# Altium PCB PCB1.PcbDoc
Units mil, origin at the board's own origin, x right, y up, seen from the top; angles counter-clockwise.
Board outline 1968.5 x 1975 mil, 2 copper layers (Top Layer, Bottom Layer); 15 components, 16 nets, 48 pads, 1 vias.
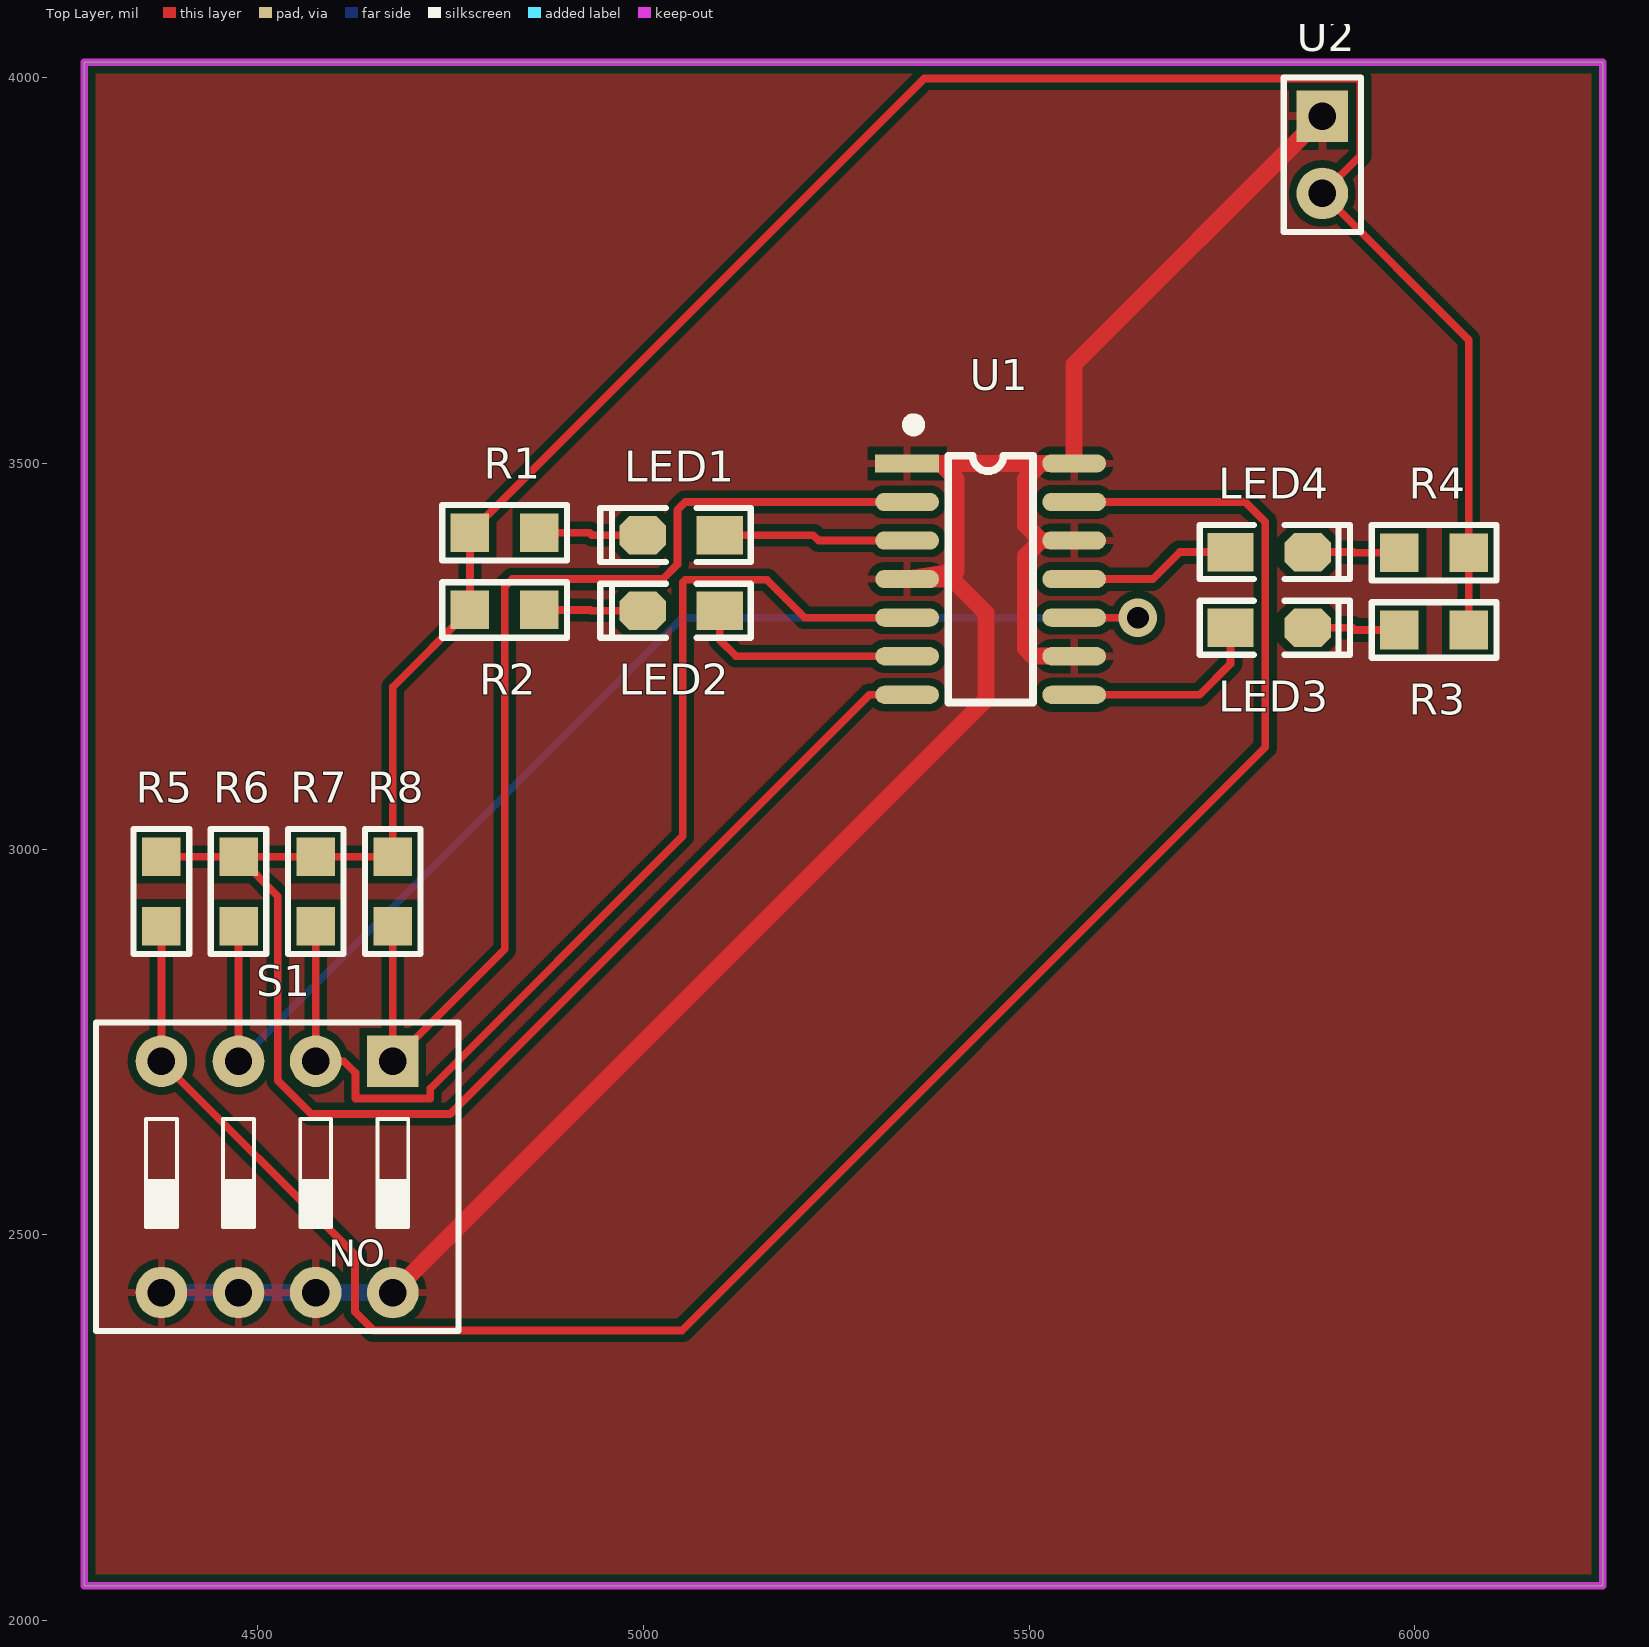
[diagram p0: Top Layer view]
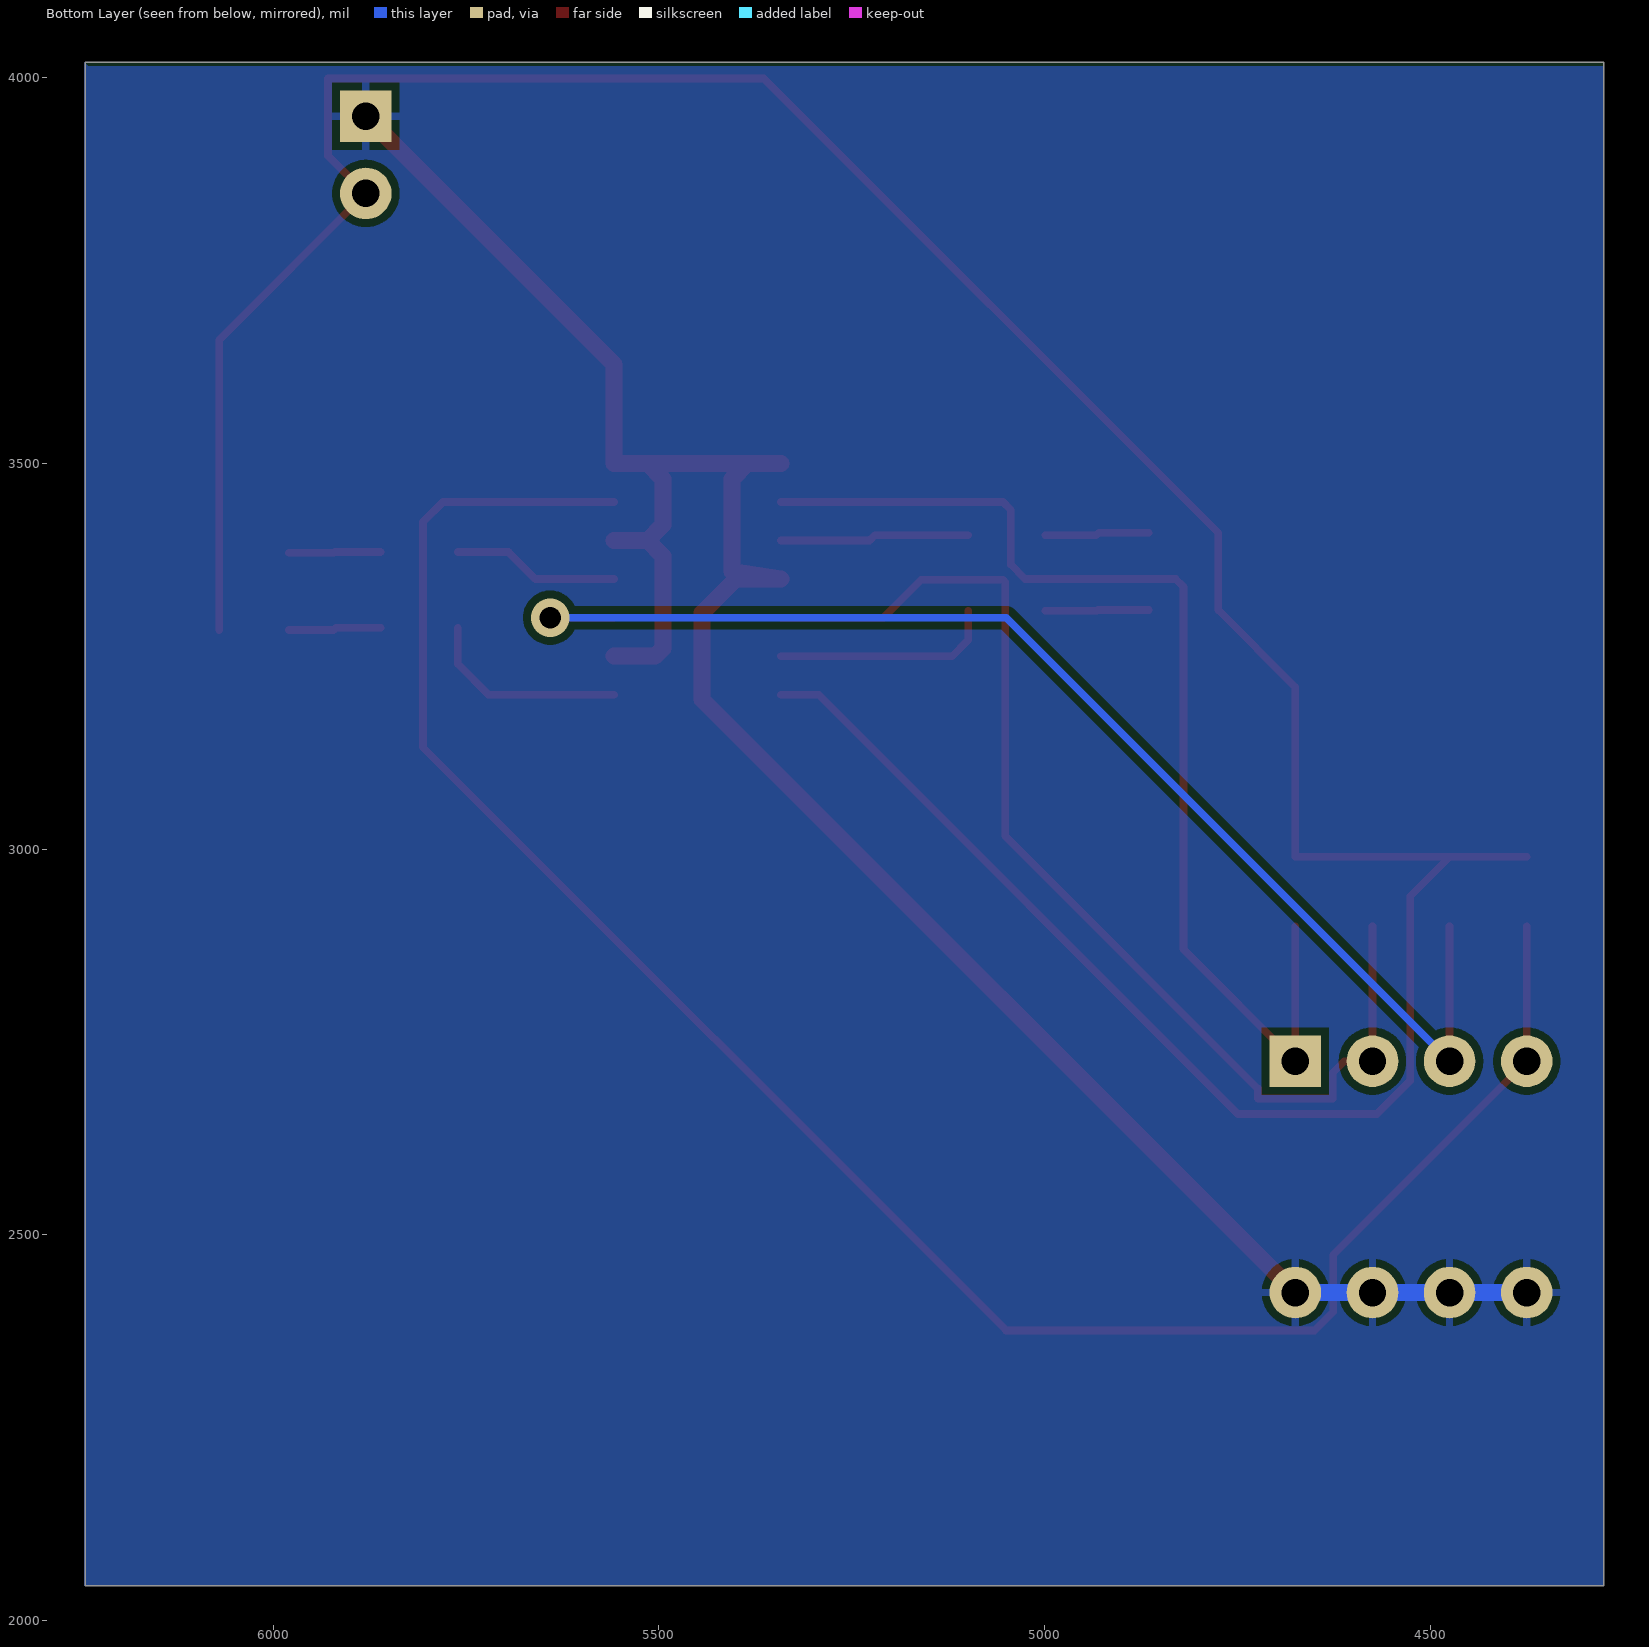
[diagram p1: Bottom Layer view, seen from below]

## Layer stack, top to bottom
Top Solder: solder mask 0.4, Solder Resist, Dk 3.5
Top Layer: signal copper 1.4
Dielectric 1: dielectric 12.6, FR-4, Dk 4.8
Bottom Layer: signal copper 1.4
Bottom Solder: solder mask 0.4, Solder Resist, Dk 3.5

## Board outline
4275,2045 6243.5,2045 6243.5,4020 4275,4020

## Design rules (kind name [scope] priority, off if disabled: settings)
Clearance [All] p1: gap=10 ignorepadtopadclearanceinfootprint=FALSE except(0: Arc-Hole Track-Hole SMDPad-Hole THPad-Hole Via-Hole Fill-Hole Poly-Hole Region-Hole Text-Hole)
PolygonConnect [All] p1: connectstyle=Relief reliefconductorwidth=10 reliefentries=4 polygonreliefangle="90 Angle" airgapwidth=10
RoutingVias [All] p1: holewidth=28 width=50 viastyle="Through Hole" minholewidth=28 minwidth=50 maxholewidth=28 maxwidth=50
SolderMaskExpansion [All] p1: expansion=4
Width Power [InNet('VDD')] p1: maxlimit=26 minlimit=14 preferedwidth=22
Width [All] p2: maxlimit=10 minlimit=10 preferedwidth=10
30 further rules are at their usual default settings.

## Components (designator, comment, footprint, x,y, rotation, side; value= is the part's Value field where it differs from the comment)
LED1 "LED_green" "LED 0805B" 5049,3407 r180 top
LED2 "LED_green" "LED 0805B" 5049,3309 r180 top
LED3 "LED_orange" "LED 0805B" 5811,3287 r0 top
LED4 "LED_red" "LED 0805B" 5811,3385 r0 top
R1 "3k" "R 0805_M" 4820,3410 r180 top
R2 "3k" "R 0805_M" 4820,3310 r180 top
R3 "3k" "R 0805_M" 6025,3284 r0 top
R4 "3k" "R 0805_M" 6025,3384 r0 top
R5 "10k" "R 0805_M" 4375,2945 r90 top
R6 "10k" "R 0805_M" 4475,2945 r90 top
R7 "10k" "R 0805_M" 4575,2945 r90 top
R8 "10k" "R 0805_M" 4675,2945 r90 top
S1 "DIPSW4" "CSW DIP-4P" 4525,2575 r180 top
U1 "74HC00D_4V" SOP14_M 5450,3350 r0 top
U2 "HDR1/2" HDR2.54-LI-2P 5880,3900 r270 top

## Footprints (in the part's own frame and the unit in brackets; to place one, negate y for a bottom-side part, rotate by r counter-clockwise, add the part's x,y. Pads: shape width x height; smd on the part's side, far side on the other; paste and mask are expansions set on the pad)
"CSW DIP-4P" [mm] "11.7*9.9*7mm"
  rect 1.7x1.7 hole 0.9: 1(-3.81,-3.81)
  round 1.7 hole 0.9: 2(-1.27,-3.81) 3(1.27,-3.81) 4(3.81,-3.81) 5(3.81,3.81) 6(1.27,3.81) 7(-1.27,3.81) 8(-3.81,3.81)
  silkscreen extent -5.97,-5.08 5.97,5.08, body extent -5.86,-4.95 5.86,4.95, height 6.65
HDR2.54-LI-2P [mm] "排针，2脚"
  rect 1.7x1.7 hole 0.9: 1(-1.27,0)
  round 1.7 hole 0.9: 2(1.27,0)
  silkscreen extent -2.54,-1.27 2.54,1.27, body extent -2.54,-1.27 2.54,1.27, height 8.5
"LED 0805B" [mil] "蓝色0805LED"
  rect 60x50 smd: 1(-50,0)
  oct 60x50 smd: 2(50,0)
  silkscreen extent -90,-35 105,35, body extent -39,-25 39,25, height 32
"R 0805_M" [mil] "1/8W贴片电阻"
  rect 50x50 smd: 1(-45,0) 2(45,0)
  silkscreen extent -81,-36 81,36, body extent -39,-25 39,25, height 20
SOP14_M [mm] "8.7*6.2*1.8mm（长宽高）"
  rect 2.1x0.6 smd: 1(-2.75,3.81)
  oval 2.1x0.6 smd: 2(-2.75,2.54) 3(-2.75,1.27) 4(-2.75,0) 5(-2.75,-1.27) 6(-2.75,-2.54) 7(-2.75,-3.81) 8(2.75,-3.81) 9(2.75,-2.54) 10(2.75,-1.27) 11(2.75,0) 12(2.75,1.27) 13(2.75,2.54) 14(2.75,3.81)
  silkscreen extent -2.67,-4.06 1.4,5.21, body extent -3,-4.35 3,4.35, height 1.9

## Via types
v1: diameter 50, hole 28, Top Layer to Bottom Layer, 1 vias

## Nets (pads, with @x,y where several pads share a name; then routed paths per layer and width w, separated by ;. In a path a pad name is that pad's centre, name@x,y a point inside that pad or via, vN(x,y) a via of type N, cw(c..) or ccw(c..) an arc to the next point about the centre after c; other vN are vias at no path point)
0: R1.2 R2.2 R3.2 R4.2 R5.2 R6.2 R7.2 R8.2 U1.7 U2.2 | length 4343.4
  Top Layer w10: R5.2 R6.2 ; U1.7 5293,3200 4749.53,2656.53 4569.47,2656.53 4526,2700 4526,2939 R6.2 ; R3.2 R4.2 6070,3660 U2.2 5929,3899 5929,3999 5364,3999 R1.2 R2.2 4675,3210 R8.2 R7.2 R6.2
1: R6.1 S1.3 U1.10 | length 1661.9
  Top Layer w10: S1.3 R6.1 ; U1.10 v1(5641,3300)
  Bottom Layer w10: S1.3 5050,3300 v1(5641,3300)
2: R8.1 S1.1 U1.2 | length 1458.9
  Top Layer w10: R8.1 S1.1 4820,2870 4820,3340 4830,3350 5025,3350 5044,3369 5044,3440 5054,3450 U1.2
3: R7.1 S1.2 U1.5 | length 1480.6
  Top Layer w10: R7.1 S1.2 4611.53,2725 4626.53,2710 4626.53,2676.53 4723.47,2676.53 4723.47,2689.47 5051,3017 5051,3346 5054,3349 5160,3349 5209,3300 U1.5
4: R5.1 S1.4 U1.13 | length 2657.6
  Top Layer w10: R5.1 S1.4 4626,2474 4626,2400 4650,2376 5050,2376 5806,3132 5806,3424 5780,3450 U1.13
5: LED1.1 U1.3 | length 245.6
  Top Layer w10: LED1.1 5220,3407 5227,3400 U1.3
6: LED2.1 U1.6 | length 289.4
  Top Layer w10: LED2.1 5099,3271 5120,3250 U1.6
7: LED3.1 U1.8 | length 266.3
  Top Layer w10: U1.8 5721,3200 5761,3240 LED3.1
8: LED4.1 U1.11 | length 217.2
  Top Layer w10: U1.11 5660,3350 5695,3385 LED4.1
9: LED1.2 R1.1 | length 135.2
  Top Layer w10: R1.1 4930,3410 4933,3407 LED1.2
10: LED2.2 R2.1 | length 134.4
  Top Layer w10: R2.1 4931,3310 4932,3309 LED2.2
11: LED3.2 R3.1 | length 120.2
  Top Layer w10: LED3.2 5919,3287 5922,3284 R3.1
12: LED4.2 R4.1 | length 119.4
  Top Layer w10: LED4.2 5920,3385 5921,3384 R4.1
GND: 
VCC: 
VDD: S1.5 S1.6 S1.7 S1.8 U1.1 U1.4 U1.9 U1.12 U1.14 U2.1 | length 3020.5
  Top Layer w22: S1.8 5444,3194 5444,3306 5397.5,3352.5 ; U1.1 5385,3500 ; U1.9 5505,3250 5495,3260 5495,3380 5515,3400 ; U1.12 5515,3400 ; U1.14 U1.14@5558,3500 ; U2.1 5558,3628 U1.14@5558,3500 ; 5385,3500 5515,3500 ; 5385,3500 5405,3480 5405,3360 ; 5397.5,3352.5 5395,3350 U1.4 5405,3360 ; 5397.5,3352.5 5405,3360 ; 5515,3400 5495,3420 5495,3480 5515,3500 ; 5515,3500 U1.14@5558,3500
  Bottom Layer w22: S1.5 S1.6 S1.7 S1.8

## Polygon pours and split planes (outlines as drawn)
VDD on Top Layer "VDD_L01_P000" (solid, pour order 0): 4275,4020 6243.5,4020 6243.5,2045 4275,2045
VDD on Bottom Layer "VDD_L02_P002" (solid, pour order 2): 4275,4015 6240,4015 6245,4020 6245,2045 4275,2045

## Keep-outs
Top Layer:
  the board outline again, w10

## Text inside footprints (layer, text, board x,y; h text height)
S1: Top Overlay "ON" at 4665,2505 h60 r180